# EAGLE board BeeTermostat (EAGLE 6.6.0)
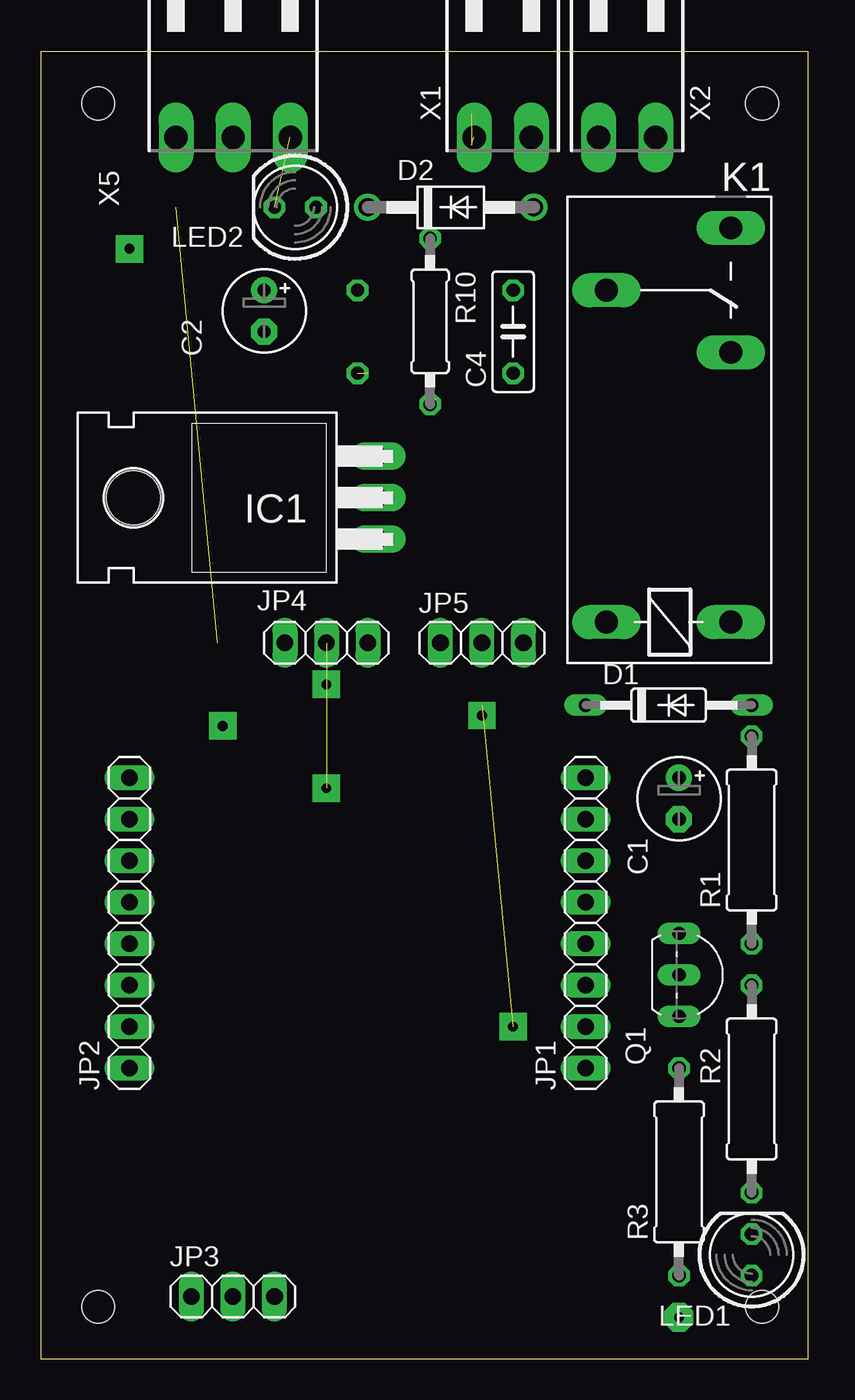
[diagram p0: board, top side]
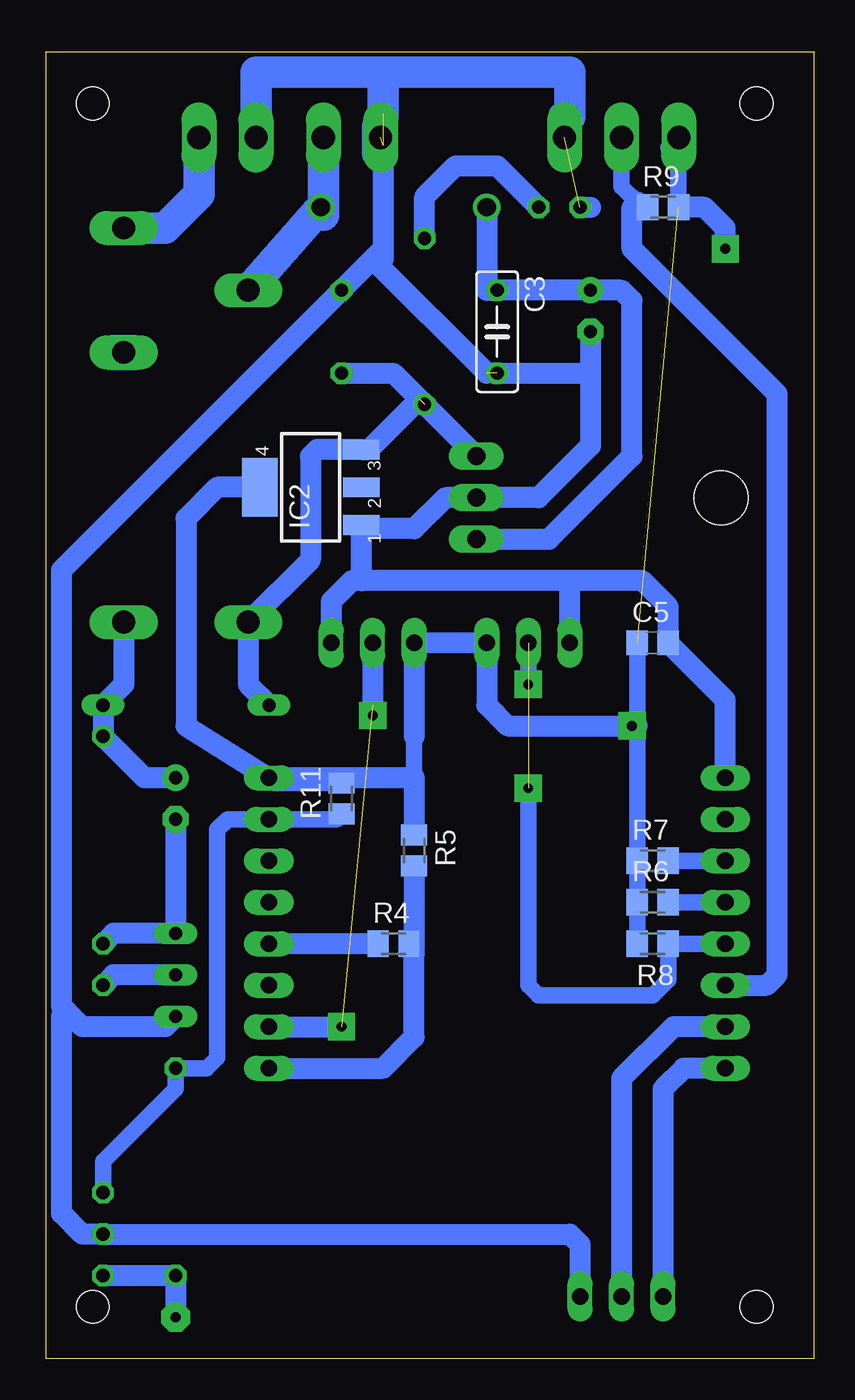
[diagram p1: board, bottom side, seen from below]

Size 47 x 80 mm. Coordinates in mm from the lower left corner, seen from the top.
Outline: 0,0 47,0 47,80 0,80 0,0
Copper layers (1*16): Top 0.035mm / dielectric 1.5mm / Bottom 0.035mm
Design rules "default": minimum track width 10mil, minimum drill 24mil, track to track 8mil, track to pad 8mil, pad to pad 8mil, via to via 8mil, smd to smd 8mil, copper to edge 40mil, drill to drill 8mil, minimum pad ring 10mil, minimum via ring 8mil, stop-mask expansion 4mil, vias tented up to drill 0mil, thermal gap 10mil
Holes 2 mm at 3.52,76.83 44.16,76.83 3.52,3.17 44.16,3.17

## Footprints (pad centres in the part's own frame; a part is rotated, then mirrored left to right if it is on the bottom)
E2,5-5 = drill 0.813 pad 1.6: + -1.27,0 | drill 0.813 pad 1.6 octagon: - 1.27,0
C050-025X075 = drill 0.813 octagon: 1 -2.54,0; 2 2.54,0
C0805 = smd 1.3 x 1.5: 1 -0.95,0; 2 0.95,0
DO35-10 = drill 0.813 long: A 5.08,0; C -5.08,0
DO41-10 = drill 1.118: A 5.08,0; C -5.08,0
TO220H = drill 1.118 long: 1 -2.54,-10.16; 2 0,-10.16; 3 2.54,-10.16 | hole 3.302: 0,4.826
SOT223 = smd 1.219 x 2.235: 1 -2.311,-3.099; 2 0,-3.099; 3 2.311,-3.099 | smd 3.6 x 2.2: 4 0,3.099
1X08 = drill 1.016 long: 1 -8.89,0; 2 -6.35,0; 3 -3.81,0; 4 -1.27,0; 5 1.27,0; 6 3.81,0; 7 6.35,0; 8 8.89,0
1X03 = drill 1.016 long: 1 -2.54,0; 2 0,0; 3 2.54,0
E3206S = drill 1.397 long: 1 -3.175,3.81; 2 -3.175,-3.81; O 13.335,-3.81; P 17.145,3.81; S 20.955,-3.81
LED5MM = drill 0.813 octagon: A -1.27,0; K 1.27,0
TO92-EBC = drill 0.813 long: B 0,-1.27; C -2.54,-1.27; E 2.54,-1.27
0309/12 = drill 0.813 octagon: 1 -6.35,0; 2 6.35,0
M0805 = smd 1.3 x 1.6: 1 -0.95,0; 2 0.95,0
0207/10 = drill 0.813 octagon: 1 -5.08,0; 2 5.08,0
90-2 = drill 1.422 long: 1 -1.75,5.25; 2 1.75,5.25
90-3 = drill 1.422 long: 1 -3.5,5.25; 2 0,5.25; 3 3.5,5.25

## Placement (x,y rotation side)
C1  10uF  [E2,5-5]  39.08,34.29 270 top
C2  10uF  [E2,5-5]  13.67,64.14 270 top
C3  0.33uF  [C050-025X075]  19.39,62.87 270 bottom
C4  0.1uF  [C050-025X075]  28.92,62.87 90 top
C5  0.01uF  [C0805]  9.87,43.81 0 bottom
D1  1N4148DO35-10  [DO35-10]  38.44,40.01 0 top
D2  1N4004  [DO41-10]  25.11,70.48 0 top
IC1  7805T  [TO220H]  10.5,52.7 90 top
IC2  LD1117S33  [SOT223]  30.82,53.34 90 bottom
JP1  [1X08]  33.36,26.67 90 top
JP2  [1X08]  5.42,26.67 90 top
JP3  TX,RX  [1X03]  11.77,3.81 0 top
JP4  reserv  [1X03]  17.48,43.81 180 top
JP5  [1X03]  27.01,43.81 0 top
K1  TRIL-5VDC  [E3206S]  38.44,48.26 90 top
LED1  [LED5MM]  43.52,6.35 90 top
LED2  [LED5MM]  15.58,70.48 180 top
Q1  BC546A  [TO92-EBC]  40.34,23.5 270 top
R1  47  [0309/12]  43.52,31.75 90 top
R2  8k  [0309/12]  43.52,16.51 90 top
R3  200  [0309/12]  39.08,11.43 90 top
R4  470  [M0805]  25.74,25.4 0 bottom
R5  10K  [M0805]  24.47,31.11 270 bottom
R6  10K  [M0805]  9.87,27.94 0 bottom
R7  10K  [M0805]  9.87,30.48 0 bottom
R8  10k  [M0805]  9.87,25.4 180 bottom
R9  10k  [M0805]  9.23,70.48 0 bottom
R10  200  [0207/10]  23.83,63.5 270 top
R11  10k  [M0805]  28.92,34.29 90 bottom
X1  [90-2]  28.28,80.01 180 top
X2  [90-2]  35.9,80.01 180 top
X5  DS18B20  [90-3]  11.77,80.01 180 top

## Library data of the parts
C1-C5 R1-R11 = rcl
D1 D2 = diode
IC1 IC2 = linear
JP1-JP5 = pinhead
K1 = relay; OC_FARNELL: unknown; OC_NEWARK: unknown
LED1 LED2 = led
Q1 = transistor-npn
X1 X2 X5 = con-weidmueller-sl35; OC_FARNELL: unknown; OC_NEWARK: unknown

## Nets
N$1: C1.+ D1.A K1.2 R1.2
N$3: C1.- Q1.C R1.1
N$4: Q1.B R2.2
N$5: JP1.7 R2.1 R3.2 R11.1
N$6: LED1.A R3.1
N$8: C2.+ C3.1 D2.C IC1.1
N$9: C4.1 D1.C IC1.3 IC2.3 K1.1 R10.2
N$10: JP2.3 R9.1 X5.2
N$11: JP2.1 JP3.1
N$12: K1.S X2.1
N$13: JP2.2 JP3.2
N$14: C2.- C3.2 C4.2 C5.2 IC1.2 IC2.1 JP2.8 JP3.3 JP4.3 JP5.3 LED1.K LED2.K Q1.E X1.2 X2.2 X5.1
N$15: JP2.5 R6.2
N$16: JP1.4 R4.1
N$17: JP1.1 R4.2 R5.2
N$18: JP2.6 R7.2
N$19: D2.A K1.P X1.1
N$21: JP2.4 JP4.2 R8.1
N$23: C5.1 IC2.4 JP1.8 JP4.1 JP5.1 R5.1 R6.1 R7.1 R8.2 R9.2 R11.2 X5.3
N$24: JP1.2 JP5.2
N$26: LED2.A R10.1

## Tracks (layer width: path | path; a pad name or v marks a point on that pad's centre or on a via)
N$1
  Bottom 1.27: K1.2 42.25,41.27 D1.A R1.2 40.98,35.56 C1.+
N$3
  Bottom 1.27: C1.- Q1.C 42.89,26.04 R1.1
N$4
  Bottom 1.27: Q1.B 42.89,23.5 R2.2
N$5
  Bottom 1.016: R2.1 43.52,12.06 39.08,16.51 R3.2 37.17,17.78 36.53,18.41 36.53,32.38 35.9,33.02 JP1.7 29.23,33.02 R11.1
N$6  (via drill 0.6 pad 1.78)
  Bottom 1.27: LED1.A R3.1 v39.08,2.54
N$7  (via drill 0.6 pad 1.68)
  other vias: 27.01,39.37
N$8
  Bottom 1.27: D2.C 20.03,65.41 C3.1 C2.+ 11.77,65.41 11.14,64.77 11.14,55.24 16.22,50.16 IC1.1
N$9  (1 unrouted)
  Bottom 1.27: C4.1 25.74,60.33 24.15,58.74 | 24.15,58.74 IC1.3 | 24.15,58.74 27.24,55.65 IC2.3 30.41,55.65 30.82,55.24 30.82,48.9 K1.1 34.63,41.27 D1.C
N$10
  Bottom 1.016: R9.1 10.5,70.48 10.82,70.8 11.77,71.75 11.77,73.66 X5.2
  Bottom 1.27: JP2.3 2.88,22.86 2.24,23.5 2.24,59.05 11.14,67.94 11.14,70.48 10.82,70.8 | 11.77,75.56 11.77,73.66
N$11
  Bottom 1.27: JP2.1 7.96,17.78 9.23,16.51 JP3.1
N$12
  Bottom 1.93: X2.1 37.65,71.28 39.71,69.22 K1.S
N$13
  Bottom 1.27: JP2.2 8.59,20.32 11.77,17.14 JP3.2
N$14  (4 unrouted)
  Bottom 1.016: 26.38,76.03 X1.2 26.53,78.74 26.38,78.74 | 14.94,76.03 X5.1
  Bottom 1.27: C2.- 13.67,60.33 | 13.67,60.33 13.67,55.88 16.85,52.7 IC1.2 22.56,52.7 24.47,50.8 27.49,50.8 IC2.1 27.72,47.7 27.64,47.62 | C3.2 13.67,60.33 | Q1.E 39.71,20.32 44.79,20.32 45.74,21.27 | 45.74,21.27 46.06,21.59 46.06,48.26 C4.2 27.01,67.31 | 45.74,21.27 46.06,20.95 46.06,8.89 44.79,7.62 LED1.K 14.94,7.62 14.31,6.99 JP3.3 | 26.38,76.2 26.38,67.94 | 26.38,67.94 27.01,67.31 | 20.03,60.33 27.01,67.31 | 26.38,67.94 26.38,67.31 | JP2.8 5.42,40.32 C5.2 8.91,46.04 10.5,47.62 14.94,47.62 | 14.94,47.62 27.64,47.62 | 27.64,47.62 28.28,47.62 29.55,46.35 JP5.3 | JP4.3 14.94,47.62 | LED2.K 13.67,70.48
  Bottom 1.93: 26.38,76.03 26.38,76.2 26.38,78.74 14.94,78.74 14.94,76.03 | 26.53,78.74 34.15,78.74 X2.2
N$15
  Bottom 1.016: JP2.5 R6.2
N$16
  Bottom 1.27: R4.1 JP1.4
N$17
  Bottom 1.27: JP1.1 26.38,17.78 24.47,19.68 24.47,24.77 24.47,25.08 | 24.47,25.08 R4.2 | R5.2 24.47,25.08
N$18
  Bottom 1.016: JP2.6 R7.2
N$19
  Bottom 1.93: X1.1 30.03,70 D2.A K1.P
N$20  (via drill 0.6 pad 1.68)
  Bottom 1.27: v5.42,67.94 5.42,69.22 6.69,70.48 7.96,70.48
N$21  (via drill 0.6, 0.6 pad 1.68)  (2 unrouted)
  Bottom 1.016: R8.1 8.91,23.18 9.87,22.23 16.85,22.23 17.48,22.86 v17.48,34.92 | JP4.2 v17.48,41.27 | JP2.4 8.59,25.4
N$22  (via drill 0.6)
  other vias: 27.01,39.37
N$23  (via drill 0.6 pad 1.68)  (1 unrouted)
  Bottom 1.016: X5.3 8.91,74.11 8.28,74.11 R9.2 | R8.2 R6.1 R7.1 10.81,38.73 C5.1 | 24.47,35.56 24.47,38.1 | R11.2 33.04,35.24 JP1.8
  Bottom 1.27: IC2.4 36.53,53.34 38.44,51.44 38.44,38.73 JP1.8 24.47,35.56 R5.1 | 24.47,38.1 JP5.1 JP4.1 20.03,40.01 18.75,38.73 v11.14,38.73 10.81,38.73
N$24  (via drill 0.6 pad 1.68)  (1 unrouted)
  Bottom 1.27: JP1.2 v28.92,20.32 | JP5.2 27.01,40.01
N$25  (via drill 0.6)
  other vias: 28.92,20.32
N$26
  Bottom 1.27: R10.1 23.83,71.12 21.93,73.03 19.39,73.03 LED2.A
N$27
  Bottom 2.184: 41.61,61.59 42.89,61.59
N$28
  Bottom 1.27: 32.72,30.48 34,30.48
N$29
  Bottom 1.27: 32.72,27.94 34,27.94
N$30
  Bottom 1.27: 32.72,22.86 34,22.86
N$31
  Bottom 1.27: 4.78,33.02 6.05,33.02
N$32
  Bottom 1.27: 41.61,45.09 42.89,45.09
N$33
  Bottom 1.27: 33.36,45.09 35.9,45.09
N$34
  Bottom 1.27: 27.01,73.66 27.01,75.56
N$35
  Bottom 1.27: 7.96,75.56 7.96,73.66
N$36
  Bottom 1.27: 8.59,75.56 8.59,74.3
N$37
  Bottom 1.27: 14.94,75.56 14.94,73.66
N$38
  Bottom 1.27: 15.58,76.2 15.58,73.66